# Altium PCB efuseV0.2.PcbDoc
Units mm, origin at the board's own origin, x right, y up, seen from the top; angles counter-clockwise.
Board outline 91 x 57 mm, 2 copper layers (Top Layer, Bottom Layer); 45 components, 35 nets, 136 pads, 60 vias.
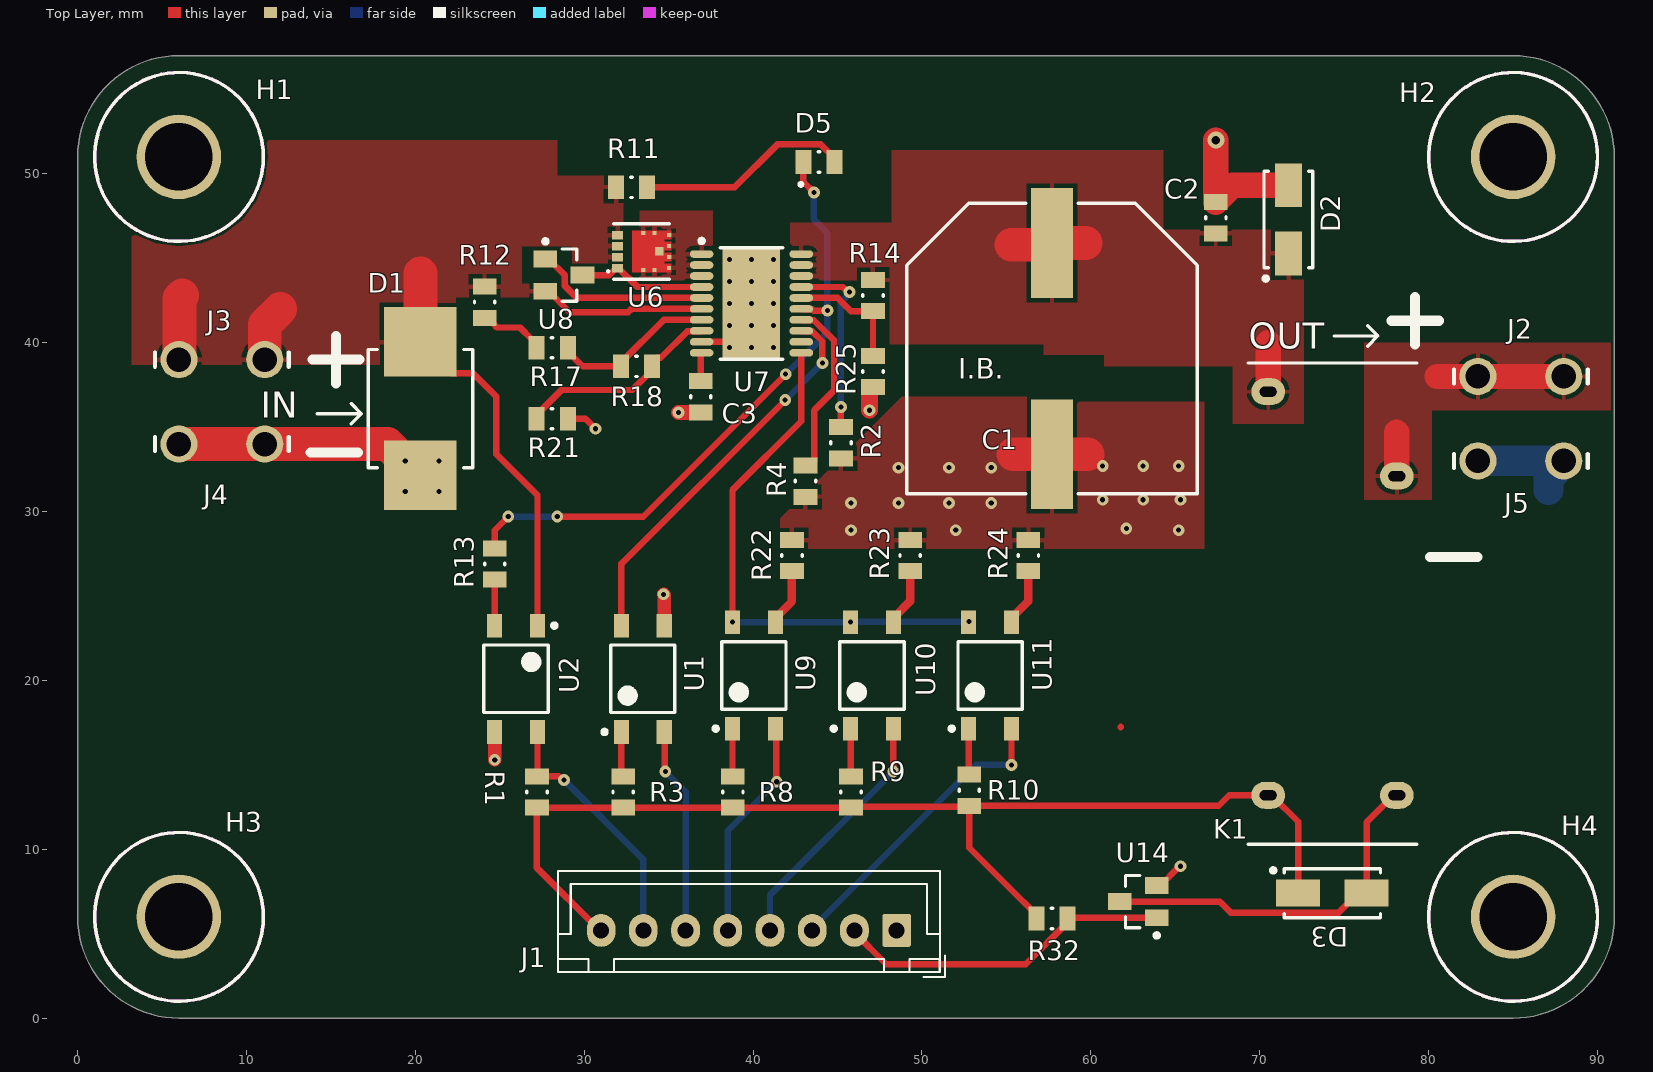
[diagram p0: Top Layer view]
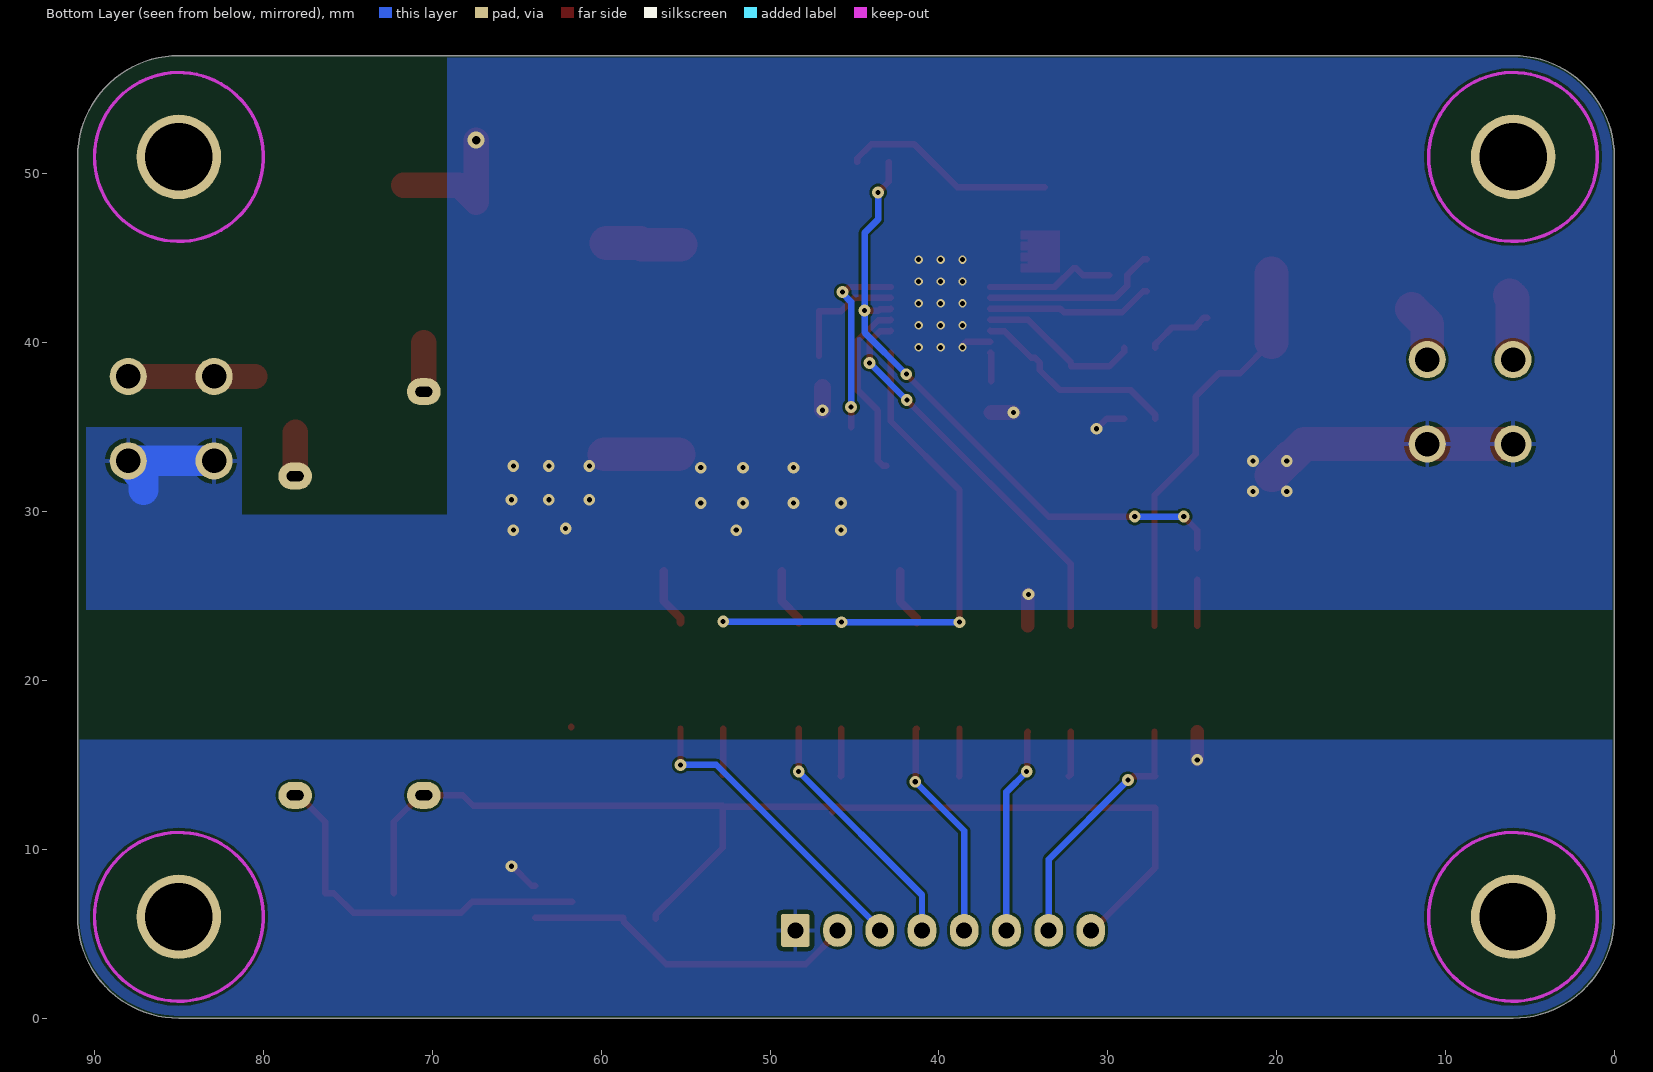
[diagram p1: Bottom Layer view, seen from below]
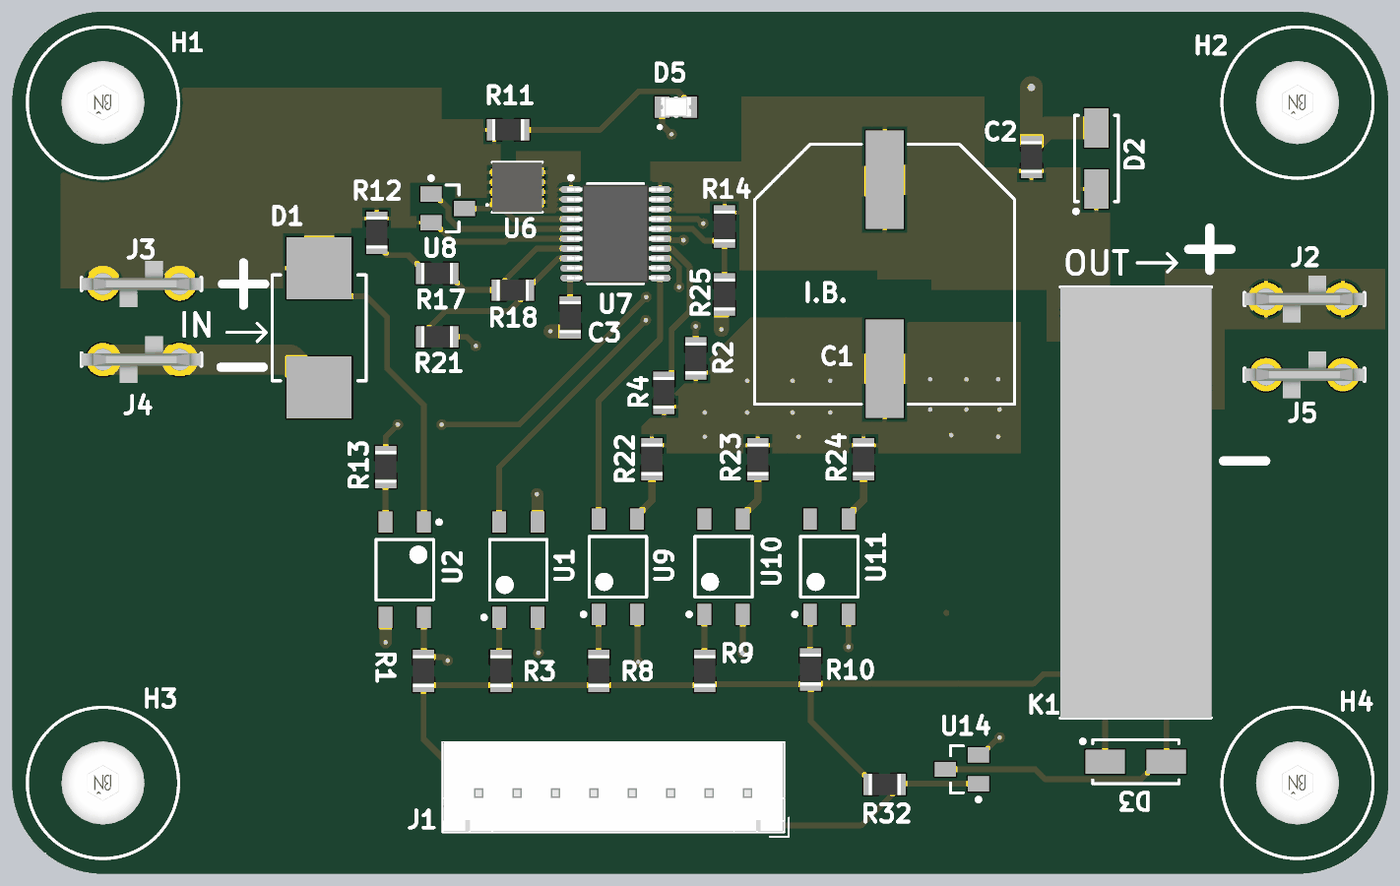
[diagram p2: 3D render of the assembled board from above, using the file's embedded part models]

## Layer stack, top to bottom
Top Solder: solder mask 0.0102, Solder Resist, Dk 3.5
Top Layer: signal copper 0.0356
Dielectric 1: dielectric 0.32, FR-4, Dk 4.8
Bottom Layer: signal copper 0.0356
Bottom Solder: solder mask 0.0102, Solder Resist, Dk 3.5

## Board outline
0,6 0,51 cw(c6,51) 6,57 85,57 cw(c85,51) 91,51 91,6 cw(c85,6) 85,0 6,0 cw(c6,6)

## Design rules (kind name [scope] priority, off if disabled: settings)
BoardOutlineClearance [All] p1: gap=0.127 ignorepadtopadclearanceinfootprint=FALSE
Clearance [All] p1: gap=0.152 ignorepadtopadclearanceinfootprint=FALSE
DiffPairsRouting [All] p1: maxlimit=1 minlimit=0.152 mostfreqgap=0.254 toplayer_minwidth=0.152 toplayer_maxwidth=1 toplayer_prefwidth=0.381 bottomlayer_minwidth=0.152 bottomlayer_maxwidth=1 bottomlayer_prefwidth=0.381 maxuncoupledlength=12.7
HoleSize [All] p1: absolutevalues=TRUE maxlimit=7 minlimit=0.152 maxpercent=80.000 minpercent=20.000
MatchedLengths [InDifferentialPair('No Differential Pair')] p1: tolerance=0.2 checknetsindiffpair=FALSE checkdiffpairvsdiffpair=TRUE checkxsignals=TRUE checkothers=TRUE usedelayunits=TRUE delaytolerance=0.200000
MinimumSolderMaskSliver [All] p1: minsoldermaskwidth=0.025
PlaneConnect [All] p1: pad.planeconnectstyle=Relief pad.reliefexpansion=0.508 pad.reliefentries=4 pad.reliefconductorwidth=0.254 pad.reliefairgap=0.254 via.planeconnectstyle=Direct via.reliefexpansion=0.508 via.reliefentries=4 via.reliefconductorwidth=0.254 via.reliefairgap=0.254
PolygonConnect [All] p1: thpad.connectstyle=Relief thpad.reliefconductorwidth=0.254 thpad.reliefentries=4 thpad.polygonreliefangle="90 Angle" thpad.airgapwidth=0.254 smdpad.connectstyle=Relief smdpad.reliefconductorwidth=0.254 smdpad.reliefentries=4 smdpad.polygonreliefangle="90 Angle" smdpad.airgapwidth=0.254 via.connectstyle=Direct via.reliefconductorwidth=0.254 via.reliefentries=4 via.polygonreliefangle="90 Angle" via.airgapwidth=0.254
RoutingVias [All] p1: holewidth=0.4 width=1 viastyle="Through Hole" minholewidth=0.3 minwidth=0.8 maxholewidth=5 maxwidth=10 useviatemplates=TRUE viatemplateguid#1={A2C38795-72A1-42C5-9264-FBB8D2F0B209} viatemplatename#1=30x70
SilkToSilkClearance [All] p1: silktosilkclearance=0.152
SilkToSolderMaskClearance [IsPad] p1: minsilkscreentomaskgap=0.025 clearancetoexposedcopper=TRUE
SolderMaskExpansion [All] p1: expansion=0.102 istentingtop=FALSE
Width Width_1 [All] p1: maxlimit=2.54 minlimit=0.152 preferedwidth=0.381
24 further rules are at their usual default settings.

## Classes and differential pairs
component class Signal: D5 J1 R1 R3 R8 R9 R10 R11 R13 R22 R23 R24 R32 U1 U2 U9 U10 U11 U14
component class eFuse: C1 C2 C3 D1 D2 D3 H1 H2 H3 H4 J2 J3 J4 J5 K1 R2 R4 R12 R14 R17 R18 R21 R25 U6 U7 U8

## Components (designator, comment, footprint, x,y, rotation, side; value= is the part's Value field where it differs from the comment)
C1 "470uF" CAP_16MM_SMD 57.7,39.65 r270 top
C2 "1uF" 0805 67.4,47.4 r270 top
C3 "100n" 0805 36.9,36.8 r270 top
D1 "SMCJ58CA-HF" "DO-214AB-SMC Bipolar" 20.3,36.1 r90 top
D2 "SS210ATR" "DO-214AC, SMA" 71.7,47.3 r90 top
D3 "SS210ATR" "DO-214AC, SMA" 74.3,7.4 r0 top
D5 "Red" "0805 LED" 43.9,50.7 r0 top
H1 "mounting hole" "M3 HOLE iso" 6,51 r0 top
H2 "mounting hole" "M3 HOLE iso" 85,51 r0 top
H3 "mounting hole" "M3 HOLE iso" 6,6 r0 top
H4 "mounting hole" "M3 HOLE iso" 85,6 r0 top
J1 "8-pin" JST_XH_B8B-XH-A_1x08_P2.50mm_Vertical 48.5,5.2 r180 top
J2 "Blade Quick Disconnect" "TE blade connector" 82.92,38 r0 top
J3 "Blade Quick Disconnect" "TE blade connector" 11.08,39 r180 top
J4 "Blade Quick Disconnect" "TE blade connector" 11.08,34 r180 top
J5 "Blade Quick Disconnect" "TE blade connector" 82.92,33 r0 top
K1 "G6RL-1A DC3" "G6RL-1A DC3 relay" 69.31,38.8 r90 top
R1 "10k" 0805 27.2,13.4 r90 top
R2 "1M" 0805 45.2,34.075 r90 top
R3 "390" 0805 32.3,13.4 r270 top
R4 "1M" 0805 43.1,31.8 r270 top
R8 "390" 0805 38.8,13.4 r270 top
R9 "390" 0805 45.8,13.4 r270 top
R10 "390" 0805 52.8,13.5 r270 top
R11 "2k" 0805 32.8,49.2 r180 top
R12 "910K" 0805 24.1,42.4 r90 top
R13 "4.3k" 0805 24.7,26.9 r270 top
R14 "1M" 0805 47.1,42.8 r90 top
R17 "75k" 0805 28.1,39.7 r180 top
R18 "24k" 0805 33.1,38.6 r180 top
R21 "33k" 0805 28.1,35.5 r180 top
R22 "13K" 0805 42.3,27.4 r270 top
R23 "6.8k" 0805 49.3,27.4 r270 top
R24 "4.3k" 0805 56.3,27.4 r270 top
R25 "56k" 0805 47.1,38.3 r90 top
R32 "10k" 0805 57.7,5.9 r180 top
U1 "WL-OCPT" 4-SOP_WE_opto-isolator 33.47,20.1 r90 top
U2 "WL-OCPT" 4-SOP_WE_opto-isolator 25.96,20.1 r270 top
U6 "‎CSD19537Q3‎" "8-VSON (3,3x3,3)" 33.5,45.4 r270 top
U7 "TPS26631PWPT" TSSOP_P065S6.6x6.6 39.9,42.325 r0 top
U8 "BSS138‎" SOT-23-3 28.8,44 r0 top
U9 "WL-OCPT" 4-SOP_WE_opto-isolator 40.05,20.3 r90 top
U10 "WL-OCPT" 4-SOP_WE_opto-isolator 47.04,20.3 r90 top
U11 "WL-OCPT" 4-SOP_WE_opto-isolator 54.03,20.3 r90 top
U14 "BSS138‎" SOT-23-3 62.8,6.9 r180 top

## Footprints (in the part's own frame and the unit in brackets; to place one, negate y for a bottom-side part, rotate by r counter-clockwise, add the part's x,y. Pads: shape width x height; smd on the part's side, far side on the other; paste and mask are expansions set on the pad)
4-SOP_WE_opto-isolator [mm] "Würth Elektronik Optocoupler Phototransistor foorptint"
  rect 1.4x0.9 smd: 1(-3.15,1.27) 2(-3.15,-1.27) 3(3.15,-1.27) 4(3.15,1.27)
  silkscreen extent -3.27,-1.9 2,2.39, body extent -2.3,-1.9 2.3,1.9, height 2.1
"8-VSON (3,3x3,3)" [mm]
  rect 0.5x0.63 smd paste-10 mask+0.08: 1(0.983,-1.534) 2(-0.976,-1.534) 2(-0.323,-1.534) 2(0.33,-1.534)
  rect 0.25x0.25 smd paste-10 mask+0: 3(-1.1,0) 3(-1.096,0.667) 3(-0.979,1.533) 3(-0.325,1.525) 3(0.329,1.534) 3(0.983,1.526) 3(1.088,0.667) 3(1.1,0)
  rect 0.5x0.5 smd paste-10 mask+0: 3(-0.008,0.952)
  Top Layer region: -1.226,-0.044 -1.226,-0.659 1.224,-0.659 1.224,1.661 0.728,1.661 0.728,1.241 0.573,1.241 0.573,1.661 0.075,1.661 0.075,1.241 -0.078,1.241 -0.078,1.661 -0.574,1.661 -0.574,1.241 -0.729,1.241 -0.729,1.661 -1.226,1.661
  silkscreen extent -1.65,-2.11 1.65,1.55, body extent -1.65,-1.75 1.65,1.55, height 1.1
0805 [mm] "Chip Resistor, 2-Leads, Body 2.00x1.25mm, IPC Medium Density"
  rect 0.95x1.4 smd: 1(-0.925,0) 2(0.925,0)
  silkscreen extent -0.05,-0.6 0.05,0.6, body extent -1.05,-0.7 1.05,0.7, height 0.6
"0805 LED" [mm] "Chip Resistor, 2-Leads, Body 2.00x1.25mm, IPC Medium Density"
  rect 0.95x1.4 smd: 1(-0.925,0) 2(0.925,0)
  silkscreen extent -1.18,-1.43 0.05,0.6, body extent -1,-0.62 1,0.62, height 0.8
CAP_16MM_SMD [mm] "Aluminum Electrolytic Capacitor, Body 17.00x17.00x16.80mm, IPC Low Density"
  rect 6.5x2.5 smd: 1(-6.25,0) 2(6.25,0)
  silkscreen extent -8.6,-8.6 8.6,8.6, body extent -8.6,-8.6 8.6,8.6, height 16.8
"DO-214AB-SMC Bipolar" [mm] "Molded Diode, 2-Leads, Body 6.75x5.90mm, IPC Medium Density"
  rect 4.1x4.3 smd: 1(-3.95,0) 2(3.95,0)
  silkscreen extent -3.5,-3.1 3.5,3.1, body extent -3.5,-3.1 3.5,3.1, height 2.39
"DO-214AC, SMA" [mm] "Molded Diode, 2-Leads, Body 5.23x2.62mm, IPC Medium Density"
  rect 2.6x1.6 smd: 1(-2.025,0) 2(2.025,0)
  silkscreen extent -3.62,-1.45 2.85,1.47, body extent -2.83,-1.42 2.83,1.42, height 2.95
"G6RL-1A DC3 relay" [mm]
  oval 1.6x2 hole 0.6 slot 1 at 90 deg paste-6: 1(-25.6,-1.19) 2(-1.7,-1.19) 3(-6.7,-8.81) 5(-25.6,-8.81)
  silkscreen extent -28.5,-10 0,0, body extent -28.5,-10 0,0, height 12.3
JST_XH_B8B-XH-A_1x08_P2.50mm_Vertical [mm]
  rrect15% 1.7x1.95 hole 0.95: 1(0,0)
  rrect100% 1.7x1.95 hole 0.95: 2(2.5,0) 3(5,0) 4(7.5,0) 5(10,0) 6(12.5,0) 7(15,0) 8(17.5,0)
  silkscreen extent -2.85,-3.51 20.06,2.75, body extent -2.46,-3.48 19.99,2.36, height 7.21
"M3 HOLE iso" [mm]
  round 5 hole 4 paste-6: 1(0,0)
  Keep-Out Layer circle w0.2: c0,0 r5
  silkscreen extent -5,-5 5,5, body extent -3.18,-2.75 3.18,2.75, height 1.5
SOT-23-3 [mm] "SOT23, 3-Leads, Body 2.92x2.40mm, Pitch 0.95mm, IPC Medium Density"
  rect 1.4x1 smd: 1(-1.1,0.95) 2(-1.1,-0.95) 3(1.1,0)
  silkscreen extent -1.22,-1.55 0.75,2.12, body extent -0.75,-1.56 0.75,1.56, height 1.2
"TE blade connector" [mm] "Quick Disconnect Connectors CONN QC TAB 0.250 SOLDER"
  round 2.2 hole 1.45: 1(0,0) 1(5.08,0)
  silkscreen extent -1.42,-0.42 6.5,0.42, body extent -1.42,-1.54 6.5,1.54, height 10.26
TSSOP_P065S6.6x6.6 [mm]
  oval 1.4x0.45 smd mask+0.05: 1(-2.95,2.925) 2(-2.95,2.275) 3(-2.95,1.625) 4(-2.95,0.975) 5(-2.95,0.325) 6(-2.95,-0.325) 7(-2.95,-0.975) 8(-2.95,-1.625) 9(-2.95,-2.275) 10(-2.95,-2.925) 11(2.95,-2.925) 12(2.95,-2.275) 13(2.95,-1.625) 14(2.95,-0.975) 15(2.95,-0.325) 16(2.95,0.325) 17(2.95,0.975) 18(2.95,1.625) 19(2.95,2.275) 20(2.95,2.925)
  rect 3.4x6.5 smd paste-6.5 mask-6.5: PAD(0,0)
  silkscreen extent -3.07,-3.3 1.85,3.82, body extent -3.2,-3.25 3.2,3.25, height 1.13

## Part data
C1: library part "cap pol"
C2 C3: library part cap
D1: library part "TVS Diode"
D2 D3: library part "shotkey diode"
D5: library part LED
K1: library part Relay
R1 R2 R3 R4 R8 R9 R10 R11 R12 R13 R14 R17 R18 R21 R22 R23 R24 R25 R32: library part res0805
U1 U2 U9 U10 U11: library part "optoc WE"
U6 U8 U14: library part "N-mosfet en"

## Via types
v1: diameter 0.7, hole 0.3, Top Layer to Bottom Layer, 44 vias
v2: diameter 0.5, hole 0.3, Top Layer to Bottom Layer, 15 vias
v3: diameter 1, hole 0.5, Top Layer to Bottom Layer, 1 vias

## Nets (pads, with @x,y where several pads share a name; then routed paths per layer and width w, separated by ;. In a path a pad name is that pad's centre, name@x,y a point inside that pad or via, vN(x,y) a via of type N, cw(c..) or ccw(c..) an arc to the next point about the centre after c; other vN are vias at no path point)
+3.3V: D3.1 J1.8 K1.1 R1.1 R3.2 R8.2 R9.2 R10.2 R32.2 | length 68.2
  Top Layer w0.381: J1.8@31,5.4 J1.8 30.9,5.2 27.2,8.9 R1.1 R3.2 R8.2 R9.2 46.025,12.475 R9.2@46.31,12.19 ; R9.2@45.85,12.525 R10.2@52.8,12.525 ; R32.2 56.775,6.125 55.2,7.7 52.8,10.1 R10.2@52.8,12.525 ; D3.1 72.275,11.625 70.7,13.2 K1.1 68.2,13.2 67.575,12.575 R10.2 R10.2@52.8,12.525
DGND: J1.1 U2.3 U14.2 | length 3.5
  Top Layer w0.381: U14.2 64.1,7.85 65.25,9 v1(65.3,9)
  Top Layer w0.8: U2.3 24.69,15.31 v1(24.7,15.3)
NetC3_1: C3.1 U7.10 | length 1.7
  Top Layer w0.381: C3.1 36.9,39.368 36.932,39.4 U7.10
NetD3_2: D3.2 K1.5 U14.3 | length 22
  Top Layer w0.381: U14.3 67.642,6.9 68.285,6.257 74.682,6.257 75.825,7.4 D3.2 76.325,11.605 77.92,13.2 K1.5
NetD5_1: D5.1 R13.1 U7.15 | length 37.9
  Top Layer w0.381: R13.1 24.7,28.9 v1(25.5,29.7) ; v1(28.4,29.7) 33.492,29.7 v1(41.928,38.136) ; U7.15 42.863,41.987 43.491,41.987 43.578,41.9 v1(44.4,41.9) ; D5.1 42.975,49.525 v1(43.6,48.9)
  Bottom Layer w0.381: v1(25.5,29.7) v1(28.4,29.7) ; v1(41.928,38.136) 44.4,40.608 v1(44.4,41.9) 44.4,46.5 43.6,47.3 v1(43.6,48.9)
NetD5_2: D5.2 R11.1 | length 12.7
  Top Layer w0.381: R11.1 38.9,49.2 41.443,51.743 44.007,51.743 44.825,50.925 D5.2
NetJ1_2: J1.2 R32.1 U14.1 | length 20.1
  Top Layer w0.381: J1.2 46,5.075 47.875,3.2 56.15,3.2 58.675,5.725 58.675,5.95 U14.1
NetJ1_3: J1.3 U11.2 | length 18.1
  Top Layer w0.381: v1(55.3,15) U11.2
  Bottom Layer w0.381: J1.3 43.5,5.325 53.175,15 v1(55.3,15)
NetJ1_4: J1.4 U10.2 | length 15
  Top Layer w0.381: v1(48.3,14.6) 48.305,14.605 48.305,17.145 U10.2
  Bottom Layer w0.381: J1.4 41,7.3 v1(48.3,14.6)
NetJ1_5: J1.5 U9.2 | length 13.2
  Top Layer w0.381: U9.2 41.36,17.11 41.36,14.04 v1(41.4,14)
  Bottom Layer w0.381: J1.5 38.5,11.1 v1(41.4,14)
NetJ1_6: J1.6 U1.2 | length 12.3
  Top Layer w0.381: U1.2 34.77,16.92 34.77,14.63 v1(34.8,14.6)
  Bottom Layer w0.381: v1(34.8,14.6) 36,13.4 J1.6
NetJ1_7: J1.7 R1.2 U2.4 | length 15.2
  Top Layer w0.381: U2.4 27.23,14.355 R1.2 28.489,14.325 28.714,14.1 v1(28.8,14.1)
  Bottom Layer w0.381: v1(28.8,14.1) 33.5,9.4 J1.7
NetJ2_1: J2.1 K1.3 | length 10.1
  Top Layer w1.5: 78.1,34.7 78.12,34.68 K1.3 ; 80.5,38 82.92,38 J2.1@88,38
NetR2_2: R2.2 U7.17 | length 11.2
  Top Layer w0.381: U7.17 45.314,43.3 45.614,43 v1(45.7,43) ; R2.2 v1(45.2,36.2)
  Bottom Layer w0.381: v1(45.2,36.2) 45.2,42.414 45.7,42.914 v1(45.7,43)
NetR3_1: R3.1 U1.1 | length 2.7
  Top Layer w0.381: U1.1 32.2,14.425 R3.1
NetR4_1: R4.1 U7.14 | length 10.7
  Top Layer w0.381: U7.14 42.863,41.337 43.596,41.337 44.793,40.14 44.793,37.166 43.61,35.983 43.61,33.009 43.325,32.725 R4.1
NetR8_1: R8.1 U9.1 | length 2.8
  Top Layer w0.381: U9.1 38.78,14.345 R8.1
NetR9_1: R9.1 U10.1 | length 2.8
  Top Layer w0.381: U10.1 45.77,14.355 R9.1
NetR10_1: R10.1 U11.1 | length 2.7
  Top Layer w0.381: U11.1 52.76,14.465 R10.1
NetR12_1: R12.1 R17.2 | length 4
  Top Layer w0.381: R12.1 24.325,41.475 24.61,41.19 24.61,41.123 24.833,40.9 26.2,40.9 26.891,40.21 27.175,39.925 R17.2
NetR13_2: R13.2 U2.2 | length 2.7
  Top Layer w0.381: U2.2 24.69,25.965 R13.2
NetR14_1: R14.1 R25.2 U7.16 | length 7.2
  Top Layer w0.381: U7.16 45.004,42.65 45.779,41.875 R14.1 R25.2
NetR17_1: R17.1 R18.2 U7.7 | length 9.8
  Top Layer w0.381: R17.1 29.025,39.475 29.9,38.6 R18.2 32.175,38.825 34.7,41.35 U7.7
NetR18_1: R18.1 R21.2 U7.8 | length 12.3
  Top Layer w0.381: R21.2 27.175,35.725 28.65,37.2 32.85,37.2 34.025,38.375 R18.1 34.025,38.825 34.31,39.11 34.535,39.11 36.112,40.687 36.937,40.687 U7.8
NetR22_2: R22.2 U9.3 | length 3.4
  Top Layer w0.5: U9.3 41.32,23.7 42.3,24.68 R22.2
NetR23_2: R23.2 U10.3 | length 3.4
  Top Layer w0.5: U10.3 48.31,23.7 49.3,24.69 R23.2
NetR24_2: R24.2 U11.3 | length 3.4
  Top Layer w0.5: U11.3 55.3,23.7 56.3,24.7 R24.2
NetU1_4: U1.4 U7.13 | length 23.3
  Top Layer w0.381: U1.4 32.2,26.9 v1(41.9,36.6) ; U7.13 42.863,40.687 43.491,40.687 44.1,40.078 v1(44.1,38.8)
  Bottom Layer w0.381: v1(41.9,36.6) v1(44.1,38.8)
NetU6_1: U6.1 U7.4 U8.3 | length 7.7
  Top Layer w0.381: U8.3 31.467,44 31.888,44.421 U6.1@31.953,44.421 ; U6.1 32.031,44.417 33.148,43.3 U7.4
NetU6_3: U6.3 U7.1 U7.2 U7.3
NetU7_5: U7.5 U8.1 | length 10.6
  Top Layer w0.381: U8.1 27.9,44.95 28.857,43.993 28.857,43.358 29.565,42.65 U7.5
NetU7_11: U7.11 U9.4 U10.4 U11.4 | length 31.6
  Top Layer w0.381: v1(38.78,23.45) 38.78,31.28 42.85,35.35 U7.11
  Bottom Layer w0.381: v1(38.78,23.45) v1(45.77,23.45) 45.786,23.466 52.758,23.466 v1(52.774,23.483)
PGND: C1.2 C2.1 C3.2 D1.1 D2.2 J4.1 J5.1 R2.1 R4.2 R21.1 R22.1 R23.1 R24.1 R25.1 U1.3 U7.9 U7.PAD | length 44.5
  Top Layer w0.381: R21.1 30.072,35.5 30.657,34.914 v1(30.657,34.906) ; U7.9 38.391,40.05 38.6,39.841 v2(38.6,39.725)
  Top Layer w0.8: v1(34.7,25.1) 34.74,25.06 U1.3
  Top Layer w0.9: v1(35.589,35.875) C3.2
  Top Layer w1: v1(46.9,36) R25.1@46.9,37.35
  Top Layer w1.5: v3(67.4,52) C2.1 68.4,49.325 D2.2
  Top Layer w2: J4.1@6,34 18.35,34 19.15,33.2 19.25,33.2 D1.1 20.25,32.15 v1(19.4,33) ; 55.4,33.4 C1.2 59.8,33.4
  Bottom Layer w1.8: J5.1@82.92,33 88,33 88,32.892 87.1,31.992 87.1,31.3
  other v1: 45.8,28.9 52,28.9 65.2,28.9 62.1,29 45.8,30.5 48.6,30.5 51.6,30.5 54.1,30.5 60.7,30.7 63.1,30.7 65.3,30.7 19.4,31.2 21.4,31.2 48.6,32.6 51.6,32.6 54.1,32.6 60.7,32.7 63.1,32.7 65.2,32.7 21.4,33
  other v2: 39.9,39.725 41.2,39.725 38.6,41.025 39.9,41.025 41.2,41.025 38.6,42.325 39.9,42.325 41.2,42.325 38.6,43.625 39.9,43.625 41.2,43.625 38.6,44.925 39.9,44.925 41.2,44.925
Vin: D1.2 J3.1 R11.2 R12.2 U2.1 U6.2 U7.6 U8.2 | length 41.6
  Top Layer w0.381: D1.2 22.16,38.19 23.41,38.19 24.8,36.8 24.8,33.4 27.23,30.97 U2.1 ; U8.2 27.9,43.05 29.15,41.8 32.6,41.8 32.8,42 U7.6
  Top Layer w2: J3.1@6,39 6.038,39.038 6.038,42.638 6.2,42.8 ; J3.1@11.08,39 11.08,41.08 12,42 ; D1.2 20.3,44.1
Vout: C1.1 C2.2 D2.1 K1.2 R14.2 U7.18 U7.19 U7.20 | length 7.3
  Top Layer w1.5: K1.2 70.5,40
  Top Layer w2: 55.3,45.8 57.6,45.8 C1.1 59.7,45.9
pads on no net: H1.1 H2.1 H3.1 H4.1 U7.12
copper on no net: | length 0
  Top Layer w0.381: 61.77,17.25 61.782,17.238

## Polygon pours and split planes (outlines as drawn)
NetJ2_1 on Top Layer "NONET_L02_P-001" (solid, pour order 6): 80.2,30.7 76.2,30.7 76.2,40 90.8,40 90.8,36 80.2,36
Vout on Top Layer "NONET_L02_P-001" (solid, pour order 4): 42.2,43.7 48.1,43.7 48.1,39.9 57.2,39.9 57.2,39.3 60.8,39.3 60.8,38.6 68.4,38.6 68.4,35.195 72.6,35.195 72.6,46.7 64.3,46.7 64.3,51.4 48.21,51.4 48.21,47.1 42.2,47.1
PGND on Top Layer "NONET_L02_P-001" (solid, pour order 5): 59.3,36.5 60.3,36.5 66.7,36.5 66.7,27.8 41.6,27.8 41.6,29.6 48.8,36.8 57.081,36.8
Vin on Top Layer "Vin_plane" (solid, remove dead copper, pour order 0): 32.3,44.7 32.3,48.6 32.295,49.9 28.4,49.9 28.4,52 9,52 9,47.4 3.2,47.4 3.2,38.7 22.4,38.7 22.4,42.7 28.2,42.7 28.2,43.5 26.3,43.5 26.3,45.7 29.3,45.7 29.3,44.7
NetU6_3 on Top Layer "NONET_L02_P-001" (solid, pour order 1): 37.6,43.7 33.3,43.7 33.3,47.8 37.6,47.8
PGND on Bottom Layer "NONET_L02_P-001" (solid, remove dead copper, pour order 3): -1.3,49.5 -1.3,58.4 69.1,58.4 69.1,42.4 69.1,29.8 81.282,29.8 81.282,35 90.5,35 90.5,29.8 90.5,24.2 69.1,24.2 -1.3,24.2
DGND on Bottom Layer "NONET_L02_P-001" (solid, pour order 2): -2.4,16.5 97.9,16.5 97.9,-0.5 -2.4,-0.5

## Silkscreen, mask and mechanical layers (free items; w line width, h text height)
Top Overlay:
  circle w0.2: c6,6 r5
  lines w0.2: 14.2,35.8 16.8,35.8 ; 16.2,35.2 16.8,35.8 ; 16.2,36.4 16.8,35.8 ; 74.4,40.4 77,40.4 ; 76.4,39.8 77,40.4 ; 76.4,41 77,40.4
  lines w0.6: 13.8,33.5 16.6,33.5 ; 13.9,39 16.7,39 ; 15.3,37.6 15.3,40.4 ; 77.8,41.3 80.6,41.3 ; 79.2,39.9 79.2,42.7 ; 80.1,27.3 82.9,27.3
  text "OUT" at 69.354,39.654 h1.52
  text "I.B." at 52.154,37.854 h1.2
  text "IN" at 10.854,35.554 h1.52
Mechanical 1:
  the board outline again, w0.2

## Text inside footprints (layer, text, board x,y; h text height)
J1: Mechanical 6 "%R" at 40.143,8.193 h1 r180